# Altium PCB TempdevAmmy.PcbDoc
Units mil, origin at the board's own origin, x right, y up, seen from the top; angles counter-clockwise.
Board outline 3150 x 3940 mil, 2 copper layers (Top Layer, Bottom Layer); 24 components, 574 nets, 84 pads, 0 vias.
Unrouted connection lines stored in the file: 13.
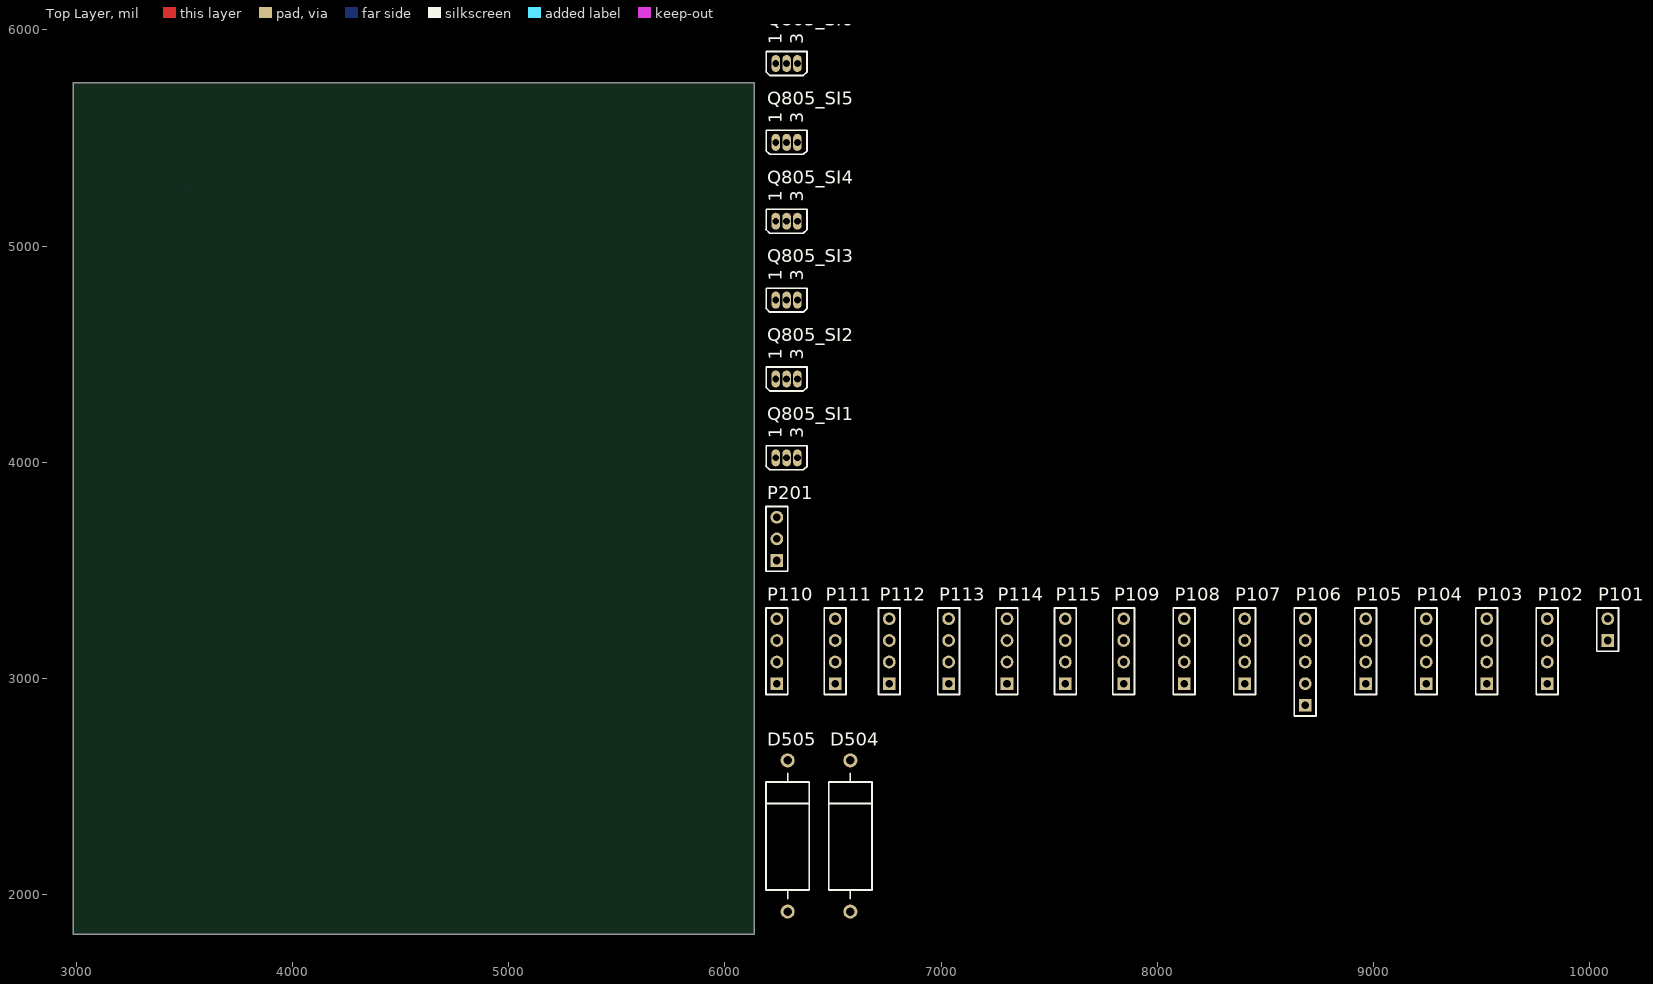
[diagram p0: Top Layer view]
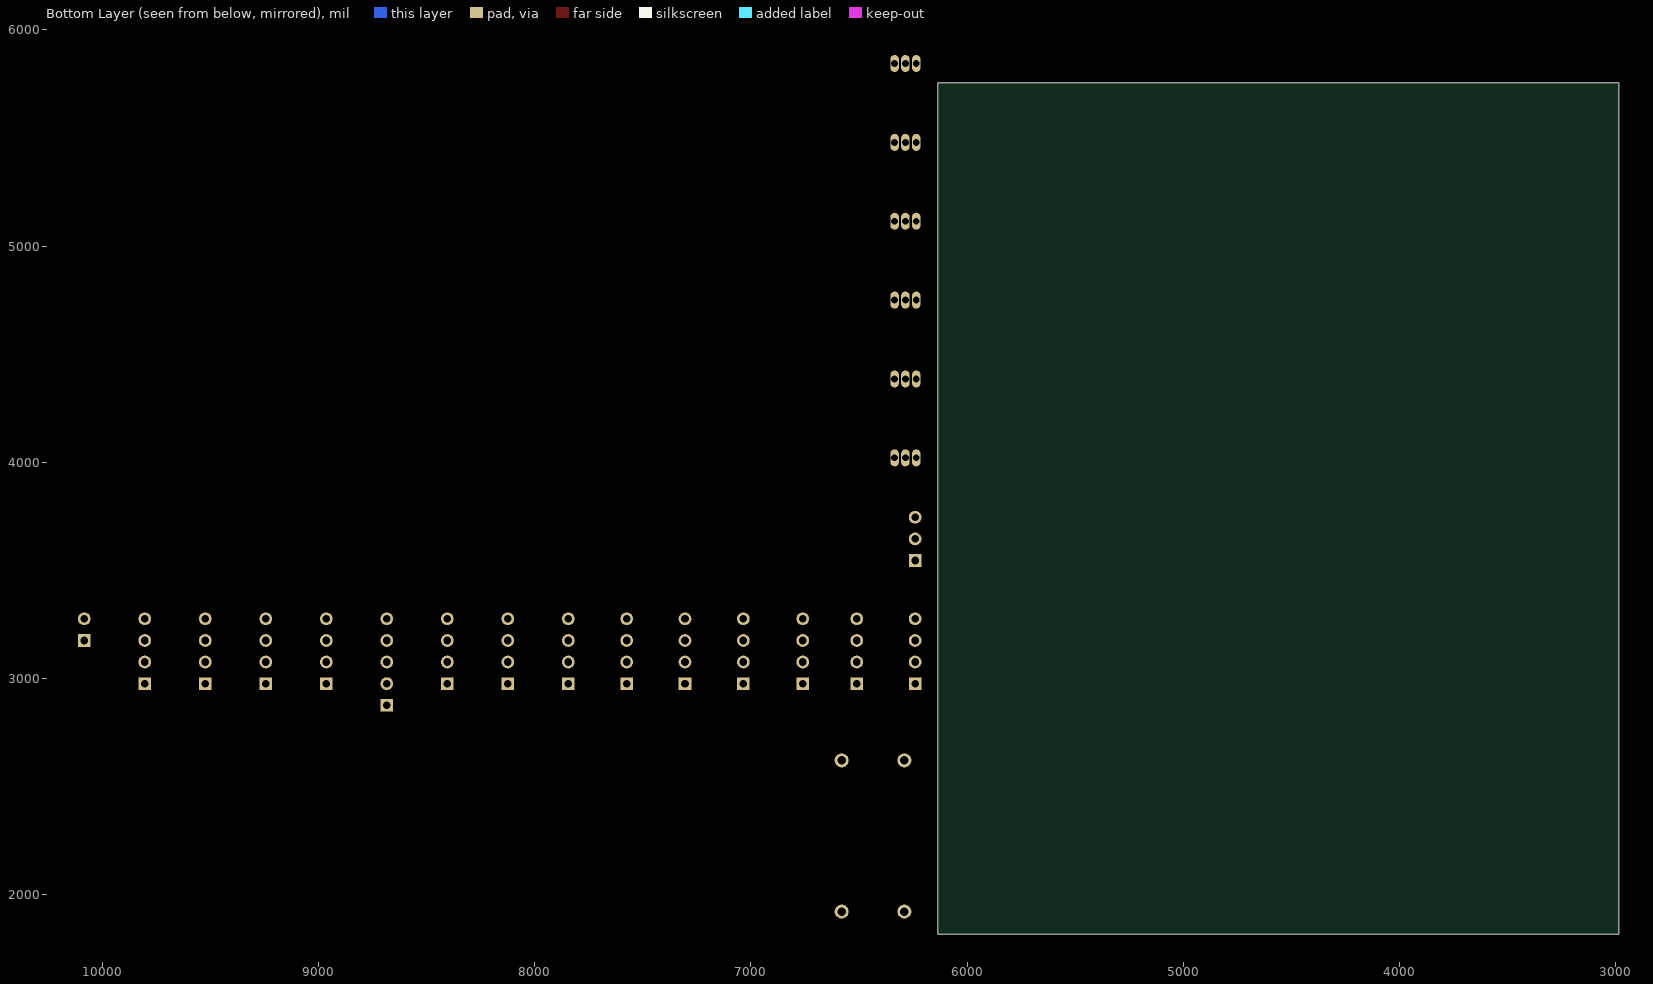
[diagram p1: Bottom Layer view, seen from below]

## Layer stack, top to bottom
Top Solder: solder mask 0.4, Solder Resist, Dk 3.5
Top Layer: signal copper 1.4
Dielectric 1: dielectric 12.6, FR-4, Dk 4.8
Bottom Layer: signal copper 1.4
Bottom Solder: solder mask 0.4, Solder Resist, Dk 3.5

## Board outline
2985,1815 2985,5755 6135,5755 6135,1815
cut-out: 3510,5285

## Design rules (kind name [scope] priority, off if disabled: settings)
Clearance [All] p1: gap=10 ignorepadtopadclearanceinfootprint=FALSE except(0: Arc-Hole Track-Hole SMDPad-Hole THPad-Hole Via-Hole Fill-Hole Poly-Hole Region-Hole Text-Hole)
DiffPairsRouting [All] p1: maxlimit=10 minlimit=10 mostfreqgap=10 toplayer_minwidth=15 toplayer_maxwidth=15 toplayer_prefwidth=15 bottomlayer_minwidth=15 bottomlayer_maxwidth=15 bottomlayer_prefwidth=15 maxuncoupledlength=500
PolygonConnect [All] p1: connectstyle=Relief reliefconductorwidth=10 reliefentries=4 polygonreliefangle="90 Angle" airgapwidth=10
RoomDefinition SI6 [InComponentClass('SI6')] p1: confinementstyle=ConfineIn formatcopy=TRUE lockcomponents=FALSE outline 6180,5780 6665,5780 6665,6095 6180,6095
RoomDefinition SI5 [InComponentClass('SI5')] p2: confinementstyle=ConfineIn formatcopy=TRUE lockcomponents=FALSE outline 6180,5415 6665,5415 6665,5730 6180,5730
RoomDefinition SI4 [InComponentClass('SI4')] p3: confinementstyle=ConfineIn formatcopy=TRUE lockcomponents=FALSE outline 6180,5050 6665,5050 6665,5365 6180,5365
RoomDefinition SI3 [InComponentClass('SI3')] p4: confinementstyle=ConfineIn formatcopy=TRUE lockcomponents=FALSE outline 6180,4685 6665,4685 6665,5000 6180,5000
RoomDefinition SI2 [InComponentClass('SI2')] p5: confinementstyle=ConfineIn formatcopy=TRUE lockcomponents=FALSE outline 6180,4320 6665,4320 6665,4635 6180,4635
RoomDefinition SI1 [InComponentClass('SI1')] p6: confinementstyle=ConfineIn formatcopy=TRUE lockcomponents=FALSE outline 6180,3955 6645,3955 6645,4270 6180,4270
RoomDefinition MCU [InComponentClass('MCU')] p7: confinementstyle=ConfineIn formatcopy=TRUE lockcomponents=FALSE outline 6180,3485 6415,3485 6415,3905 6180,3905
RoomDefinition homepage [InComponentClass('homepage')] p8: confinementstyle=ConfineIn formatcopy=TRUE lockcomponents=FALSE outline 6180,2815 10250,2815 10250,3435 6180,3435
RoomDefinition HMI [InComponentClass('HMI')] p9: confinementstyle=ConfineIn formatcopy=TRUE lockcomponents=FALSE outline 6180,1875 6725,1875 6725,2765 6180,2765
RoutingVias [All] p1: holewidth=28 width=50 viastyle="Through Hole" minholewidth=28 minwidth=50 maxholewidth=28 maxwidth=50
SolderMaskExpansion [All] p1: expansion=4
Width [All] p1: maxlimit=10 minlimit=10 preferedwidth=10
29 further rules are at their usual default settings.

## Classes and differential pairs
channel class viout: VI1 VI2 VI3 VI4 VI5 VI6
channel class sensorinterface: SI1 SI2 SI3 SI4 SI5 SI6
component class RS485: C401 C402 C403 C404 C405 C406 D401 D402 D403 L401 MOV401 MOV402 PTC401 PTC402 R401 R402 R403 R404 R405 U401
component class homepage: P101 P102 P103 P104 P105 P106 P107 P108 P109 P110 P111 P112 P113 P114 P115
differential pair REFIN1: +REFIN1_P -REFIN1_N
differential pair CHN8: +CHN8_P -CHN8_N

## Components (designator, comment, footprint, x,y, rotation, side; value= is the part's Value field where it differs from the comment)
D504 "BZX584C5V6" DIODE-0.7 6580,2270 r90 top
D505 "BZX584C5V6" DIODE-0.7 6290,2270 r90 top
P101 "Header 2" HDR1X2 10085,3175 r90 top
P102 "Header 4" HDR1X4 9805,2975 r90 top
P103 "Header 4" HDR1X4 9525,2975 r90 top
P104 "Header 4" HDR1X4 9245,2975 r90 top
P105 "Header 4" HDR1X4 8965,2975 r90 top
P106 "Header 5" HDR1X5 8685,2875 r90 top
P107 "Header 4" HDR1X4 8405,2975 r90 top
P108 "Header 4" HDR1X4 8125,2975 r90 top
P109 "Header 4" HDR1X4 7845,2975 r90 top
P110 "Header 4" HDR1X4 6240,2975 r90 top
P111 "Header 4" HDR1X4 6510,2975 r90 top
P112 "Header 4" HDR1X4 6760,2975 r90 top
P113 "Header 4" HDR1X4 7035,2975 r90 top
P114 "Header 4" HDR1X4 7305,2975 r90 top
P115 "Header 4" HDR1X4 7575,2975 r90 top
P201 "Header 3" HDR1X3 6240,3545 r90 top
Q805_SI1 "BSS138" E3 6285,4020 r90 top (schematic designator Q805)
Q805_SI2 "BSS138" E3 6285,4385 r90 top (schematic designator Q805)
Q805_SI3 "BSS138" E3 6285,4750 r90 top (schematic designator Q805)
Q805_SI4 "BSS138" E3 6285,5115 r90 top (schematic designator Q805)
Q805_SI5 "BSS138" E3 6285,5480 r90 top (schematic designator Q805)
Q805_SI6 "BSS138" E3 6285,5845 r90 top (schematic designator Q805)

## Footprints (in the part's own frame and the unit in brackets; to place one, negate y for a bottom-side part, rotate by r counter-clockwise, add the part's x,y. Pads: shape width x height; smd on the part's side, far side on the other; paste and mask are expansions set on the pad)
DIODE-0.7 [mm] "Diode, Thru-Hole; 2 Leads; 0.7 in Pin Spacing"
  round 1.65 hole 1: 1(-8.89,0) 2(8.89,0)
  silkscreen extent -7.37,-2.54 7.37,2.54
E3 [mm] "TO, Flat Index; 3 In-Line, Axial Leads; Body Dia. 4.6mm; Lead Dia. 0.5 mm (max)"
  oval 2x1 hole 0.8: 1(0,1.27) 2(0,0) 3(0,-1.27)
  silkscreen extent -1.41,-2.41 1.41,2.41
HDR1X2 [mm] "Connector; Header; 2 Position"
  rect 1.5x1.5 hole 0.9: 1(0,0)
  round 1.5 hole 0.9: 2(2.54,0)
  silkscreen extent -1.27,-1.27 3.81,1.27
HDR1X3 [mm] "Connector; Header; 3 Position"
  rect 1.5x1.5 hole 0.9: 1(0,0)
  round 1.5 hole 0.9: 2(2.54,0) 3(5.08,0)
  silkscreen extent -1.27,-1.27 6.35,1.27
HDR1X4 [mm] "Connector; Header; 4 Position"
  rect 1.5x1.5 hole 0.9: 1(0,0)
  round 1.5 hole 0.9: 2(2.54,0) 3(5.08,0) 4(7.62,0)
  silkscreen extent -1.27,-1.27 8.89,1.27
HDR1X5 [mm] "Connector; Header; 5 Position"
  rect 1.5x1.5 hole 0.9: 1(0,0)
  round 1.5 hole 0.9: 2(2.54,0) 3(5.08,0) 4(7.62,0) 5(10.16,0)
  silkscreen extent -1.27,-1.27 11.43,1.27

## Part data
D504 D505: library part "D Zener", "Zener Diode", LatestRevisionDate=17-Jul-2002, LatestRevisionNote="Re-released for DXP Platform.", PackageDescription="Diode, Thru-Hole; 2 Leads; 0.7 in Pin Spacing", PackageReference=DIODE-0.7, Published=8-Jun-2000, Publisher="Altium Limited"
P101: "Header, 2-Pin", LatestRevisionDate=17-Jul-2002, LatestRevisionNote="Re-released for DXP Platform.", Publisher="Altium Limited"
P102 P103 P104 P105 P107 P108 P109 P110 P111 P112 P113 P114 P115: "Header, 4-Pin", LatestRevisionDate=17-Jul-2002, LatestRevisionNote="Re-released for DXP Platform.", Publisher="Altium Limited"
P106: "Header, 5-Pin", LatestRevisionDate=17-Jul-2002, LatestRevisionNote="Re-released for DXP Platform.", Publisher="Altium Limited"
P201: "Header, 3-Pin", LatestRevisionDate=17-Jul-2002, LatestRevisionNote="Re-released for DXP Platform.", Publisher="Altium Limited"
Q805_SI1 Q805_SI2 Q805_SI3 Q805_SI4 Q805_SI5 Q805_SI6: library part MOSFET-N, "N-Channel MOSFET", LatestRevisionDate=17-Jul-2002, LatestRevisionNote="Re-released for DXP Platform.", PackageDescription="TO, Flat Index; 3 In-Line, Axial Leads; Body Dia. 4.6mm; Lead Dia. 0.5 mm (max)", PackageReference=E3, PackageVersion=1995/1996, Published=8-Jun-2000, Publisher="Altium Limited"

## Nets (pads, with @x,y where several pads share a name; then routed paths per layer and width w, separated by ;. In a path a pad name is that pad's centre, name@x,y a point inside that pad or via, vN(x,y) a via of type N, cw(c..) or ccw(c..) an arc to the next point about the centre after c; other vN are vias at no path point)
3.3V: 
3.3VCC: 
3.3VS: 
3.3VSON: 
3W/4\W\(ON)_SI1: 
3W/4\W\(ON)_SI2: 
3W/4\W\(ON)_SI3: 
3W/4\W\(ON)_SI4: 
3W/4\W\(ON)_SI5: 
3W/4\W\(ON)_SI6: 
3W/4W(ON)1: 
3W/4W(ON)2: 
3W/4W(ON)3: 
3W/4W(ON)4: 
3W/4W(ON)5: 
3W/4W(ON)6: 
3W/4W+1: P110.3
3W/4W+2: P111.3
3W/4W+3: P112.3
3W/4W+4: P113.3
3W/4W+5: P114.3
3W/4W+6: P115.3
3W/4W-1: P110.2
3W/4W-2: P111.2
3W/4W-3: P112.2
3W/4W-4: P113.2
3W/4W-5: P114.2
3W/4W-6: P115.2
3W/4WON1: 
3W/4WON2: 
3W/4WON3: 
3W/4WON4: 
3W/4WON5: 
3W/4WON6: 
3W_ON_G_SI1: 
3W_ON_G_SI2: 
3W_ON_G_SI3: 
3W_ON_G_SI4: 
3W_ON_G_SI5: 
3W_ON_G_SI6: 
4W1: P110.4
4W2: P111.4
4W3: P112.4
4W4: P113.4
4W5: P114.4
4W6: P115.4
4W_ON_G_SI1: 
4W_ON_G_SI2: 
4W_ON_G_SI3: 
4W_ON_G_SI4: 
4W_ON_G_SI5: 
4W_ON_G_SI6: 
5VGND: D504.1 D505.1 P201.1
5VIN: 
5VLDO: 
15V1: 
15V2: 
15V3: 
15V4: 
15V5: 
15V6: 
485WR/RD: 
+VS1: P102.1
+VS2: P103.1
+VS3: P104.1
+VS4: 
+VS5: P107.1
+VS6: 
+VSENSE_VI1: 
+VSENSE_VI2: 
+VSENSE_VI3: 
+VSENSE_VI4: 
+VSENSE_VI5: 
+VSENSE_VI6: 
-15V1: 
-15V2: 
-15V3: 
-15V4: 
-15V5: 
-15V6: 
-VS1: P102.3 P102.4
-VS2: P103.3 P103.4
-VS3: P104.3 P104.4
-VS4: P105.2 P105.3
-VS5: P107.3 P107.4
-VS6: P108.2 P108.3
-VSENSE_VI1: 
-VSENSE_VI2: 
-VSENSE_VI3: 
-VSENSE_VI4: 
-VSENSE_VI5: 
-VSENSE_VI6: 
AD0_VI1: 
AD0_VI2: 
AD0_VI3: 
AD0_VI4: 
AD0_VI5: 
AD0_VI6: 
AD1_VI1: 
AD1_VI2: 
AD1_VI3: 
AD1_VI4: 
AD1_VI5: 
AD1_VI6: 
ADC1_VI1: 
ADC1_VI2: 
ADC1_VI3: 
ADC1_VI4: 
ADC1_VI5: 
ADC1_VI6: 
ADC2_VI1: 
ADC2_VI2: 
ADC2_VI3: 
ADC2_VI4: 
ADC2_VI5: 
ADC2_VI6: 
ADC\S\: 
ADDIN: 
ADDOUT: 
ADSCLK: 
ADSTATUS: 
AIN12: 
AIN13: 
AVLDO: 
AVLDOGND: 
AVSS: 
BUTTON1: 
BUTTON2: 
BUTTON3: 
BUTTON4: 
BUTTON5A: 
BUTTON5B: 
BUTTON5C: 
BUTTON5D: 
BUTTON5E: 
BUTTON5F: 
C\S\: 
CCOMP_VI1: 
CCOMP_VI2: 
CCOMP_VI3: 
CCOMP_VI4: 
CCOMP_VI5: 
CCOMP_VI6: 
CD/IRQ_VI1: 
CD/IRQ_VI2: 
CD/IRQ_VI3: 
CD/IRQ_VI4: 
CD/IRQ_VI5: 
CD/IRQ_VI6: 
CHART_VI1: 
CHART_VI2: 
CHART_VI3: 
CHART_VI4: 
CHART_VI5: 
CHART_VI6: 
CHN8_N: 
CHN8_P: 
CHNN1: 
CHNN2: 
CHNN3: 
CHNN4: 
CHNN5: 
CHNN6: 
CHNP1: 
CHNP2: 
CHNP3: 
CHNP4: 
CHNP5: 
CHNP6: 
CHNxO\N\1: 
CHNxO\N\2: 
CHNxO\N\3: 
CHNxO\N\4: 
CHNxO\N\5: 
CHNxO\N\6: 
CLKOUT_VI1: 
CLKOUT_VI2: 
CLKOUT_VI3: 
CLKOUT_VI4: 
CLKOUT_VI5: 
CLKOUT_VI6: 
D+: D504.2
D-: D505.2
DA_F\A\L\U\T\1: 
DA_F\A\L\U\T\2: 
DA_F\A\L\U\T\3: 
DA_F\A\L\U\T\4: 
DA_F\A\L\U\T\5: 
DA_F\A\L\U\T\6: 
DA_L\D\A\C\: 
DA_R\E\S\E\T\: 
DA_S\Y\N\C\1: 
DA_S\Y\N\C\2: 
DA_S\Y\N\C\3: 
DA_S\Y\N\C\4: 
DA_S\Y\N\C\5: 
DA_S\Y\N\C\6: 
DA_SCLK: 
DA_SDI: 
DA_SDO: 
DAGND: 
DASTATUS: 
DIN: 
DOUT: 
DUPLEX/SDI_VI1: 
DUPLEX/SDI_VI2: 
DUPLEX/SDI_VI3: 
DUPLEX/SDI_VI4: 
DUPLEX/SDI_VI5: 
DUPLEX/SDI_VI6: 
DVLDO: 
DVLDOGND_VI1: 
F\A\L\U\T\_VI1: 
F\A\L\U\T\_VI2: 
F\A\L\U\T\_VI3: 
F\A\L\U\T\_VI4: 
F\A\L\U\T\_VI5: 
F\A\L\U\T\_VI6: 
FAULT: 
GPIO_0_VI1: 
GPIO_0_VI2: 
GPIO_0_VI3: 
GPIO_0_VI4: 
GPIO_0_VI5: 
GPIO_0_VI6: 
GPIO_1_VI1: 
GPIO_1_VI2: 
GPIO_1_VI3: 
GPIO_1_VI4: 
GPIO_1_VI5: 
GPIO_1_VI6: 
GPIO_2_VI1: 
GPIO_2_VI2: 
GPIO_2_VI3: 
GPIO_2_VI4: 
GPIO_2_VI5: 
GPIO_2_VI6: 
HART_CD/IRQ: 
HART_DUPLEX/SDI: 
HART_DUPLEX/SDI2: 
HART_DUPLEX/SDI3: 
HART_DUPLEX/SDI4: 
HART_DUPLEX/SDI5: 
HART_DUPLEX/SDI6: 
HART_OUT/SDO: 
HART_R\T\S\/SCLK: 
HART_RXD/C\S\: 
IOUT1: Q805_SI1.1 Q805_SI2.1 Q805_SI3.1 Q805_SI4.1 Q805_SI5.1 Q805_SI6.1
L\D\A\C\_VI1: 
L\D\A\C\_VI2: 
L\D\A\C\_VI3: 
L\D\A\C\_VI4: 
L\D\A\C\_VI5: 
L\D\A\C\_VI6: 
MOD_IN_VI1: 
MOD_IN_VI2: 
MOD_IN_VI3: 
MOD_IN_VI4: 
MOD_IN_VI5: 
MOD_IN_VI6: 
MOD_INF_VI1: 
MOD_INF_VI2: 
MOD_INF_VI3: 
MOD_INF_VI4: 
MOD_INF_VI5: 
MOD_INF_VI6: 
MOD_OUT_VI1: 
MOD_OUT_VI2: 
MOD_OUT_VI3: 
MOD_OUT_VI4: 
MOD_OUT_VI5: 
MOD_OUT_VI6: 
NetC201_2: 
NetC204_1: 
NetC305_1: 
NetC405_2: 
NetC406_1: 
NetC624_VI1_2: 
NetC624_VI2_2: 
NetC624_VI3_2: 
NetC624_VI4_2: 
NetC624_VI5_2: 
NetC624_VI6_2: 
NetC630_VI1_2: 
NetC630_VI2_2: 
NetC630_VI3_2: 
NetC630_VI4_2: 
NetC630_VI5_2: 
NetC630_VI6_2: 
NetC632_VI1_2: 
NetC632_VI2_2: 
NetC632_VI3_2: 
NetC632_VI4_2: 
NetC632_VI5_2: 
NetC632_VI6_2: 
NetC708_2: 
NetC709_2: 
NetC802_SI1_2: 
NetC802_SI2_2: 
NetC802_SI3_2: 
NetC802_SI4_2: 
NetC802_SI5_2: 
NetC802_SI6_2: 
NetD201_2: 
NetD301_1: 
NetD301_2: 
NetD303_1: 
NetD303_2: 
NetD304_1: 
NetD305_1: 
NetD306_1: 
NetD307_1: 
NetD308_1: 
NetD401_1: 
NetD402_1: 
NetD501_2: 
NetD506_1: 
NetD508_1: 
NetD508_2: 
NetD509_1: 
NetD509_2: 
NetD510_1: 
NetD510_2: 
NetD511_1: 
NetD511_2: 
NetL401_1: 
NetL401_2: 
NetNTC701_1: 
NetNTC701_2: 
NetQ301_2: 
NetQ501_2: 
NetQ502_2: 
NetQ503_2: 
NetQ504_2: 
NetQ801_SI1_2: 
NetQ801_SI2_2: 
NetQ801_SI3_2: 
NetQ801_SI4_2: 
NetQ801_SI5_2: 
NetQ801_SI6_2: 
NetQ802_SI1_2: 
NetQ802_SI2_2: 
NetQ802_SI3_2: 
NetQ802_SI4_2: 
NetQ802_SI5_2: 
NetQ802_SI6_2: 
NetQ803_SI1_1: 
NetQ803_SI1_2: 
NetQ803_SI2_1: 
NetQ803_SI2_2: 
NetQ803_SI3_1: 
NetQ803_SI3_2: 
NetQ803_SI4_1: 
NetQ803_SI4_2: 
NetQ803_SI5_1: 
NetQ803_SI5_2: 
NetQ803_SI6_1: 
NetQ803_SI6_2: 
NetQ804_SI1_1: 
NetQ804_SI1_2: 
NetQ804_SI2_1: 
NetQ804_SI2_2: 
NetQ804_SI3_1: 
NetQ804_SI3_2: 
NetQ804_SI4_1: 
NetQ804_SI4_2: 
NetQ804_SI5_1: 
NetQ804_SI5_2: 
NetQ804_SI6_1: 
NetQ804_SI6_2: 
NetQ805_SI1_2: Q805_SI1.2
NetQ805_SI1_3: Q805_SI1.3
NetQ805_SI2_2: Q805_SI2.2
NetQ805_SI2_3: Q805_SI2.3
NetQ805_SI3_2: Q805_SI3.2
NetQ805_SI3_3: Q805_SI3.3
NetQ805_SI4_2: Q805_SI4.2
NetQ805_SI4_3: Q805_SI4.3
NetQ805_SI5_2: Q805_SI5.2
NetQ805_SI5_3: Q805_SI5.3
NetQ805_SI6_2: Q805_SI6.2
NetQ805_SI6_3: Q805_SI6.3
NetQ806_SI1_2: 
NetQ806_SI1_5: 
NetQ806_SI2_2: 
NetQ806_SI2_5: 
NetQ806_SI3_2: 
NetQ806_SI3_5: 
NetQ806_SI4_2: 
NetQ806_SI4_5: 
NetQ806_SI5_2: 
NetQ806_SI5_5: 
NetQ806_SI6_2: 
NetQ806_SI6_5: 
NetR201_1: 
NetR209_2: 
NetR210_2: 
NetR211_2: 
NetR212_1: 
NetR305_1: 
NetR312_1: 
NetR313_1: 
NetR315_1: 
NetR316_1: 
NetR319_1: 
NetR320_1: 
NetR604_VI1_2: 
NetR604_VI2_2: 
NetR604_VI3_2: 
NetR604_VI4_2: 
NetR604_VI5_2: 
NetR604_VI6_2: 
NetR612_VI1_2: 
NetR612_VI2_2: 
NetR612_VI3_2: 
NetR612_VI4_2: 
NetR612_VI5_2: 
NetR612_VI6_2: 
NetR621_VI1_2: 
NetR621_VI2_2: 
NetR621_VI3_2: 
NetR621_VI4_2: 
NetR621_VI5_2: 
NetR621_VI6_2: 
NetR705_1: 
PE: P106.5
PGND1_VI1: 
PGND1_VI2: 
PGND1_VI3: 
PGND1_VI4: 
PGND1_VI5: 
PGND1_VI6: 
PGND2_VI1: 
PGND2_VI2: 
PGND2_VI3: 
PGND2_VI4: 
PGND2_VI5: 
PGND2_VI6: 
PowerOK: 
PSW: 
R\E\S\E\T\_VI1: 
R\E\S\E\T\_VI2: 
R\E\S\E\T\_VI3: 
R\E\S\E\T\_VI4: 
R\E\S\E\T\_VI5: 
R\E\S\E\T\_VI6: 
RA_VI1: 
RA_VI2: 
RA_VI3: 
RA_VI4: 
RA_VI5: 
RA_VI6: 
RB_VI1: 
RB_VI2: 
RB_VI3: 
RB_VI4: 
RB_VI5: 
RB_VI6: 
REFIN1_N: 
REFIN1_P: 
REFIN_VI1: 
REFIN_VI2: 
REFIN_VI3: 
REFIN_VI4: 
REFIN_VI5: 
REFIN_VI6: 
REFOUT: 
RET1: P110.1
RET2: P111.1
RET3: P112.1
RET4: P113.1
RET5: P114.1
RET6: P115.1
RS485_N: P106.3
RS485_P: P106.2
RS485_Rxd: 
RS485_Txd: 
Rxd/D-: P201.2
S\Y\N\C\_VI1: 
S\Y\N\C\_VI2: 
S\Y\N\C\_VI3: 
S\Y\N\C\_VI4: 
S\Y\N\C\_VI5: 
S\Y\N\C\_VI6: 
SCL: 
SCLK: 
SCLK_VI1: 
SCLK_VI2: 
SCLK_VI3: 
SCLK_VI4: 
SCLK_VI5: 
SCLK_VI6: 
SDA: 
SDI_VI1: 
SDI_VI2: 
SDI_VI3: 
SDI_VI4: 
SDI_VI5: 
SDI_VI6: 
SDO_VI1: 
SDO_VI2: 
SDO_VI3: 
SDO_VI4: 
SDO_VI5: 
SDO_VI6: 
SGND: 
SS2: 
SW+_VI1: 
SW+_VI2: 
SW+_VI3: 
SW+_VI4: 
SW+_VI5: 
SW+_VI6: 
SW-_VI1: 
SW-_VI2: 
SW-_VI3: 
SW-_VI4: 
SW-_VI5: 
SW-_VI6: 
Txd/D+: P201.3
U\A\R\T\_\R\T\S\/SCLK_VI1: 
U\A\R\T\_\R\T\S\/SCLK_VI2: 
U\A\R\T\_\R\T\S\/SCLK_VI3: 
U\A\R\T\_\R\T\S\/SCLK_VI4: 
U\A\R\T\_\R\T\S\/SCLK_VI5: 
U\A\R\T\_\R\T\S\/SCLK_VI6: 
UART_IN/C\S\_VI1: 
UART_IN/C\S\_VI2: 
UART_IN/C\S\_VI3: 
UART_IN/C\S\_VI4: 
UART_IN/C\S\_VI5: 
UART_IN/C\S\_VI6: 
UART_OUT/SDO_VI1: 
UART_OUT/SDO_VI2: 
UART_OUT/SDO_VI3: 
UART_OUT/SDO_VI4: 
UART_OUT/SDO_VI5: 
UART_OUT/SDO_VI6: 
USB5V: P109.1
USB5VCC: 
USB+: P109.2
USB-: P109.3
USBGND: P109.4
USBISPE\N\: 
V+: 
VDPC+_VI1: 
VDPC+_VI2: 
VDPC+_VI3: 
VDPC+_VI4: 
VDPC+_VI5: 
VDPC+_VI6: 
VDPC-_VI1: 
VDPC-_VI2: 
VDPC-_VI3: 
VDPC-_VI4: 
VDPC-_VI5: 
VDPC-_VI6: 
VI_VI1: 
VI_VI2: 
VI_VI3: 
VI_VI4: 
VI_VI5: 
VI_VI6: 
VIN+: P101.2
VIN-: P101.1
VIOUT1: P102.2
VIOUT2: P103.2
VIOUT3: P104.2
VIOUT4: P105.1
VIOUT5: P107.2
VIOUT6: P108.1
VISOGND: P106.4
VISOOUT: P106.1
±15VsON: 
pads on no net: P105.4 P108.4

## Silkscreen, mask and mechanical layers (free items; w line width, h text height)
Mechanical 1:
  the board outline again, w11.81

## Dimensions
2985,5755 to 6135,5755 on Mechanical 1
2985,5755 to 2985,1815 on Mechanical 1

## Text inside footprints (layer, text, board x,y; h text height)
Q805_SI1: Top Overlay "1" at 6263.15,4109.57 h59.05 r90; Top Overlay "3" at 6362.28,4109.57 h59.05 r90
Q805_SI2: Top Overlay "1" at 6263.15,4474.57 h59.05 r90; Top Overlay "3" at 6362.28,4474.57 h59.05 r90
Q805_SI3: Top Overlay "1" at 6263.15,4839.57 h59.05 r90; Top Overlay "3" at 6362.28,4839.57 h59.05 r90
Q805_SI4: Top Overlay "1" at 6263.15,5204.57 h59.05 r90; Top Overlay "3" at 6362.28,5204.57 h59.05 r90
Q805_SI5: Top Overlay "1" at 6263.15,5569.57 h59.05 r90; Top Overlay "3" at 6362.28,5569.57 h59.05 r90
Q805_SI6: Top Overlay "1" at 6263.15,5934.57 h59.05 r90; Top Overlay "3" at 6362.28,5934.57 h59.05 r90